# Altium PCB PCB_6位IN12-辉光管时钟_2_2024-12-10.pcbdoc (part 2 of 2)
Units mm, origin at the board's own origin, x right, y up, seen from the top; angles counter-clockwise.
Board outline 250.51 x 113.84 mm, 2 copper layers (Top Layer, Bottom Layer); 109 components, 183 nets, 545 pads, 291 vias.
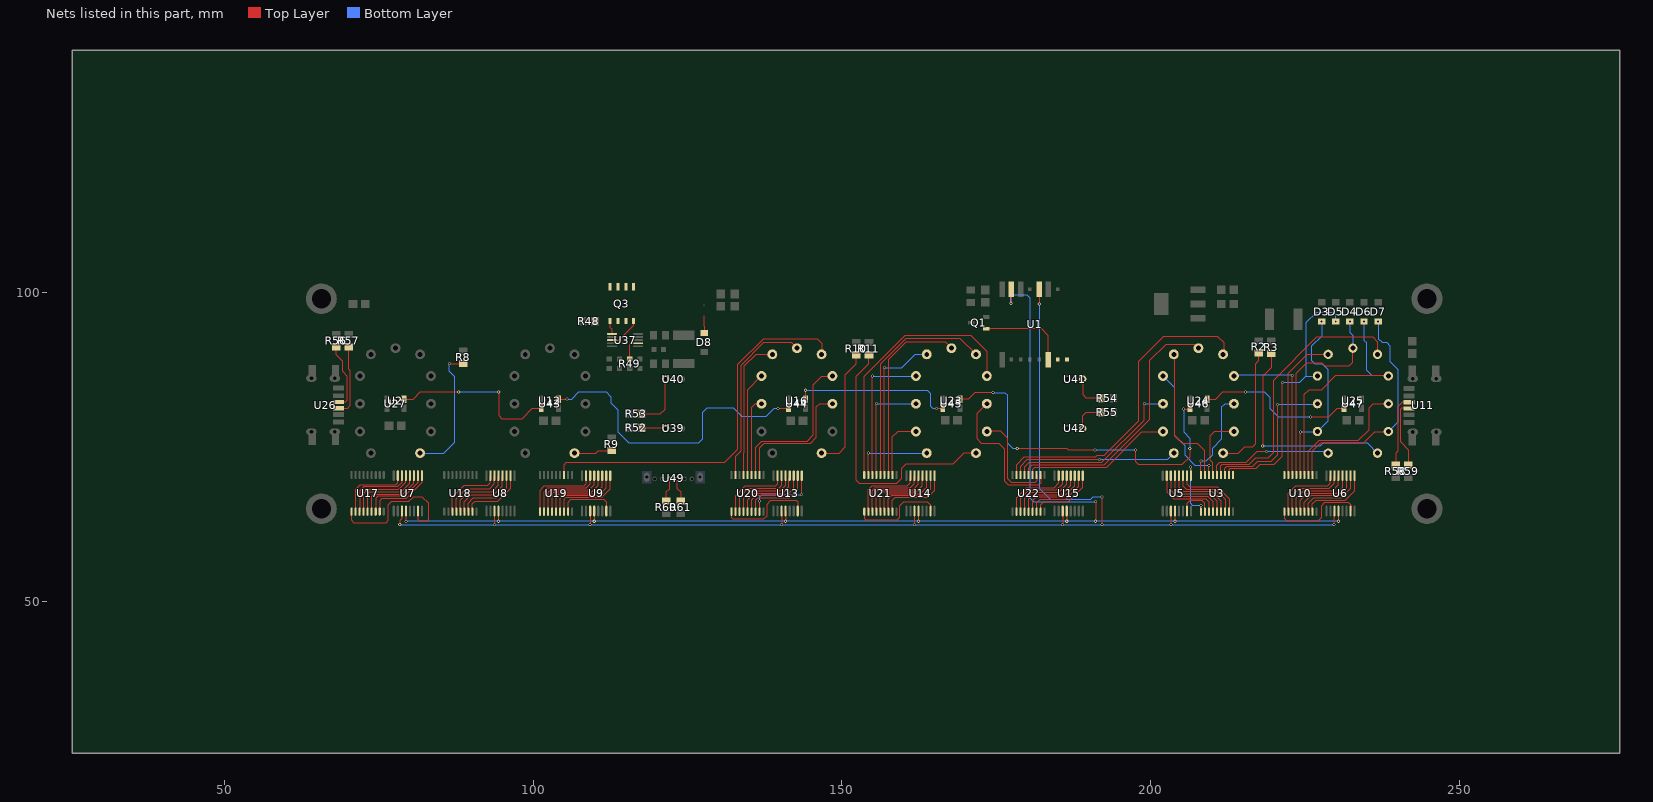
[diagram p2: the nets of this part, all layers, seen from the top]

## Via types
v1: diameter 0.5, hole 0.31, Top Layer to Bottom Layer, tented both sides, 288 vias
v2: diameter 0.62, hole 0.31, Top Layer to Bottom Layer, tented both sides, 3 vias

## Nets (pads, with @x,y where several pads share a name; then routed paths per layer and width w, separated by ;. In a path a pad name is that pad's centre, name@x,y a point inside that pad or via, vN(x,y) a via of type N, cw(c..) or ccw(c..) an arc to the next point about the centre after c; other vN are vias at no path point) (continued)
N3_3: U16.9 U20.13 | length 12.8
  Top Layer w0.15: U20.13@135.366,70.49 135.367,81.443 135.964,82.04 U16.9@136.976,82.02
N3_4: U16.8 U20.14 | length 17
  Top Layer w0.15: U20.14@134.716,70.49 134.717,84.257 U16.8@136.975,86.515
N3_5: U16.7 U20.15 | length 23
  Top Layer w0.15: U20.15@134.066,70.49 134.067,74.046 134.186,74.166 134.186,88.136 136.091,90.041 U16.7@138.728,90.021
N3_6: U16.6 U20.17 | length 29.1
  Top Layer w0.15: U20.17@132.766,70.49 132.766,73.508 133.678,74.42 133.678,88.263 137.361,91.946 141.783,91.946 U16.6@142.715,91.011
N3_7: U16.5 U19.12 | length 62
  Top Layer w0.15: U19.12@105.016,70.49 105.017,72.174 105.357,72.515 131.011,72.515 133.17,74.674 133.17,88.39 137.361,92.581 145.997,92.581 146.759,91.819 146.759,90.076 U16.5@146.704,90.021
N3_8: U16.4 U20.12 | length 26.5
  Top Layer w0.15: U20.12@136.015,70.49 136.015,74.978 136.98,75.944 144.346,75.944 145.362,76.96 145.362,85.088 146.759,86.485 148.425,86.485 U16.4@148.456,86.515
N3_9: U16.3 U20.11 | length 22
  Top Layer w0.15: U20.11@136.665,70.49 136.665,74.867 137.437,75.639 144.93,75.639 145.87,76.579 145.87,81.532 146.378,82.04 U16.3@148.456,82.02
N4_0: U22.12 U23.2 | length 16.5
  Top Layer w0.15: U23.2@173.456,77.525 173.526,77.595 175.715,77.595 176.858,76.452 176.858,69.848 177.493,69.213 181.176,69.213 181.516,69.553 U22.12@181.516,70.49
N4_1: U21.17 U23.11 | length 13
  Top Layer w0.15: U21.17@154.266,70.49 v1(154.266,74.039)
  Bottom Layer w0.15: v1@154.265,74.039 U23.11@163.728,74.019
N4_2: U21.11 U23.10 | length 10.4
  Top Layer w0.15: U21.11@158.166,70.49 158.166,76.682 159.078,77.595 161.906,77.595 U23.10@161.975,77.525
N4_3: U21.15 U23.9 | length 18
  Top Layer w0.15: U21.15@155.566,70.49 v1(155.566,82.04)
  Bottom Layer w0.15: v1(155.566,82.04) U23.9@161.975,82.02
N4_4: U21.16 U23.8 | length 23.1
  Top Layer w0.15: U21.16@154.916,70.49 v1(154.916,86.485)
  Bottom Layer w0.15: v1(154.916,86.485) 161.944,86.485 U23.8@161.975,86.516
N4_5: U21.13 U23.7 | length 25.1
  Top Layer w0.15: U21.13@156.866,70.49 v1(156.866,87.882)
  Bottom Layer w0.15: v1(156.866,87.882) 159.713,87.882 161.872,90.041 U23.7@163.728,90.021
N4_6: U21.12 U23.6 | length 30.4
  Top Layer w0.15: U21.12@157.516,70.49 157.516,89.113 160.348,91.946 166.782,91.946 U23.6@167.717,91.011
N4_7: U21.14 U23.5 | length 36.2
  Top Layer w0.15: U21.14@156.216,70.49 156.216,88.448 160.348,92.581 169.144,92.581 U23.5@171.704,90.021
N4_8: U21.18 U23.4 | length 43.6
  Top Layer w0.15: U21.18@153.616,70.49 153.617,86.485 160.221,93.089 170.889,93.089 173.429,90.549 173.429,86.543 U23.4@173.457,86.515
N4_9: U22.11 U23.3 | length 24.2
  Top Layer w0.15: U23.3@173.456,82.02 171.905,80.47 171.905,76.325 172.667,75.563 175.461,75.563 176.35,74.674 176.35,69.467 176.985,68.832 181.811,68.832 182.167,69.187 U22.11@182.166,70.49
N5_0: U3.15 U24.2 | length 10.7
  Top Layer w0.15: U3.15@210.066,70.49 210.066,72.454 209.624,72.896 209.624,76.833 210.386,77.595 213.386,77.595 U24.2@213.456,77.525
N5_1: U22.16 U24.11 | length 27.1
  Top Layer w0.15: U22.16@178.916,70.49 178.916,71.907 180.031,73.022 v1(191.717,73.023)
  Bottom Layer w0.15: v1(191.717,73.023) 202.731,73.023 U24.11@203.728,74.019
N5_2: U22.13 U24.10 | length 24.6
  Top Layer w0.15: U22.13@180.866,70.49 180.866,71.443 181.176,71.753 192.86,71.753 198.575,77.468 201.918,77.468 U24.10@201.975,77.525
N5_3: U22.15 U24.9 | length 29.5
  Top Layer w0.15: U22.15@179.566,70.49 179.566,71.795 180.285,72.514 192.099,72.514 198.957,79.372 v1(198.956,82.04)
  Bottom Layer w0.15: v1(198.956,82.04) U24.9@201.975,82.02
N5_4: U3.16 U24.8 | length 20.4
  Top Layer w0.15: U3.16@209.416,70.49 v1(209.416,72.007)
  Bottom Layer w0.15: U24.8@201.976,86.515 203.909,84.582 203.909,76.833 205.56,75.182 205.56,73.658 207.211,72.007 v1(209.416,72.007)
N5_5: U3.17 U24.7 | length 23
  Top Layer w0.15: U24.7@203.728,90.021 203.909,89.84 203.909,76.833 205.179,75.563 207.592,75.563 208.766,74.389 U3.17@208.766,70.49
N5_6: U22.14 U24.6 | length 42.8
  Top Layer w0.15: U22.14@180.216,70.49 180.217,71.557 180.793,72.133 192.48,72.133 199.846,79.499 199.846,89.024 202.513,91.691 207.036,91.691 U24.6@207.717,91.011
N5_7: U22.17 U24.5 | length 51.8
  Top Layer w0.15: U22.17@178.266,70.49 178.266,72.146 179.523,73.403 191.083,73.403 191.337,73.657 192.48,73.657 198.068,79.245 198.068,88.897 202.132,92.961 210.768,92.961 211.784,91.945 211.784,90.101 U24.5@211.704,90.021
N5_8: U10.16 U24.4 | length 25.6
  Top Layer w0.15: U10.16@222.916,70.49 v1(222.916,86.612)
  Bottom Layer w0.15: U24.4@213.456,86.516 213.551,86.612 v1(222.916,86.612)
N5_9: U3.18 U24.3 | length 15.1
  Top Layer w0.15: U3.18@208.116,70.49 v1(208.116,72.769)
  Bottom Layer w0.15: v1(208.116,72.769) 208.989,72.769 210.005,73.785 210.005,74.801 211.529,76.325 211.529,81.532 212.037,82.04 U24.3@213.456,82.02
N6_0: D7.1 U10.11 U25.2 | length 37.7
  Top Layer w0.15: U10.11@226.166,70.49 226.166,74.324 227.531,75.69 234.516,75.69 236.294,77.468 238.399,77.468 U25.2@238.456,77.525
  Bottom Layer w0.15: v1(236.802,95.349) 236.802,92.581 237.437,91.946 238.199,91.946 238.707,91.438 238.707,88.898 239.977,87.628 239.977,79.046 U25.2@238.456,77.525
N6_1: U3.14 U25.11 | length 20.6
  Top Layer w0.15: U3.14@210.716,70.49 210.717,72.082 211.149,72.514 215.464,72.514 217.242,74.292 v1(218.768,74.293)
  Bottom Layer w0.15: v1(218.768,74.293) 228.455,74.293 U25.11@228.728,74.019
N6_2: D3.1 U10.14 U25.10 | length 30.8
  Top Layer w0.15: U10.14@224.216,70.49 v1(224.216,77.468)
  Bottom Layer w0.15: v1(224.216,77.468) 226.918,77.468 U25.10@226.975,77.525 228.674,79.223 228.674,87.628 227.785,88.517 226.515,88.517 226.007,89.025 226.007,91.311 227.658,92.962 v1(227.658,95.349)
N6_3: U3.12 U25.9 | length 25.1
  Top Layer w0.15: U3.12@212.015,70.49 212.015,71.605 212.292,71.879 216.48,71.879 217.339,72.738 219.498,72.738 220.547,73.787 v1(220.546,81.913)
  Bottom Layer w0.15: v1(220.546,81.913) 226.867,81.913 U25.9@226.975,82.02
N6_4: D5.1 U3.11 U25.8 | length 43.8
  Top Layer w0.15: U3.11@212.665,70.49 212.665,71.366 212.876,71.574 217.064,71.574 217.72,72.23 220.008,72.23 221.309,73.53 v1(221.308,85.469)
  Bottom Layer w0.15: v1(221.308,85.469) 224.102,85.469 225.118,86.485 ; U25.8@226.975,86.516 226.944,86.485 225.118,86.485 ; v1(229.944,95.349) 229.944,96.391 229.563,96.772 226.769,96.772 225.118,95.121 225.118,86.485
N6_5: U10.17 U25.7 | length 24.2
  Top Layer w0.15: U10.17@222.266,70.49 222.266,86.934 225.372,90.041 U25.7@228.728,90.021
N6_6: D4.1 U10.15 U25.6 | length 33.6
  Top Layer w0.15: U10.15@223.566,70.49 223.566,86.965 225.245,88.644 227.658,88.644 228.166,88.136 232.103,88.136 232.738,88.771 U25.6@232.715,91.011
  Bottom Layer w0.15: v1(232.23,95.349) 232.23,93.597 232.738,93.089 U25.6@232.715,91.011
N6_7: U3.13 U25.5 | length 44.7
  Top Layer w0.15: U3.13@211.366,70.49 211.367,71.971 211.606,72.209 215.921,72.209 216.958,73.246 218.992,73.246 219.912,74.165 219.912,85.849 226.897,92.834 235.914,92.834 236.676,92.072 236.676,90.05 U25.5@236.704,90.021
N6_8: D6.1 U10.13 U25.4 | length 39.9
  Top Layer w0.15: U10.13@224.866,70.49 224.866,83.565 225.626,84.326 227.658,84.326 229.944,86.612 238.361,86.612 U25.4@238.456,86.516
  Bottom Layer w0.15: v1(234.516,95.349) 234.516,92.327 234.897,91.946 234.897,87.501 235.786,86.612 238.361,86.612 U25.4@238.456,86.516
N6_9: U10.12 U25.3 | length 22
  Top Layer w0.15: U10.12@225.516,70.49 225.517,74.31 227.277,76.071 233.627,76.071 235.405,77.849 235.405,81.405 236.04,82.04 U25.3@238.456,82.02
N6_DOT: U10.18
R5_2: R49.2 U37.2 | length 3.8
  Top Layer w0.15: R49.2@115.644,89.27 115.644,91.565 115.906,91.827 U37.2@116.992,91.827
R8_1: R8.1 U2.1 | length 21.7
  Top Layer w0.15: v1(86.434,88.517) R8.1@88.715,88.522
  Bottom Layer w0.15: U2.1@81.704,74.019 85.526,74.019 87.323,75.817 87.323,86.358 86.434,87.247 v1(86.434,88.517)
RST: U1.15
RX: Q1.1 U1.13 | length 14.4
  Top Layer w0.15: Q1.1@173.394,94.171 182.317,94.17 183.427,93.063 U1.13@183.426,89.167
S$10303: 
S$16964: 
S$16968: 
S$16978: 
S$17387: R52.2 U39.1 | length 3.8
  Top Layer w0.15: R52.2@117.66,78.103 121.364,78.103 U39.1@121.446,78.02
S$17391: R53.2 U40.1 | length 8.9
  Top Layer w0.15: R53.2@117.66,80.389 120.597,80.389 121.359,81.151 121.359,85.934 U40.1@121.446,86.02
S$17611: R54.2 U41.2 | length 5.8
  Top Layer w0.15: U41.2@188.986,86.02 189.05,85.956 189.05,83.437 189.558,82.929 R54.2@191.987,82.929
S$17615: R55.2 U42.2 | length 5.3
  Top Layer w0.15: U42.2@188.986,78.02 188.986,80.07 189.558,80.643 R55.2@191.987,80.643
S$18692: 
S$18696: 
S$18700: 
S$18704: 
S$19023: R56.2 U26.A5 | length 10.9
  Top Layer w0.15: R56.2@68.146,91.199 68.146,89.914 69.162,88.898 69.162,87.247 69.924,86.485 69.924,82.548 69.684,82.307 U26.A5@68.528,82.307
S$19027: R57.2 U26.B5 | length 11.6
  Top Layer w0.15: U26.B5@68.528,81.308 69.953,81.308 70.433,81.788 70.433,87.373 70.179,87.627 R57.2@70.178,91.199
S$19205: R59.2 U11.A5 | length 11
  Top Layer w0.15: R59.2@241.723,72.087 241.723,74.579 240.358,75.944 240.358,81.024 240.587,81.253 U11.A5@241.802,81.253
S$19212: R58.2 U11.B5 | length 11.7
  Top Layer w0.15: R58.2@239.691,72.087 239.691,74.006 239.977,74.293 239.977,81.532 240.698,82.253 U11.B5@241.802,82.254
S$23110: U27.3 U43.1 | length 27.4
  Top Layer w0.15: U27.3@79.116,82.77 80.561,82.771 81.735,83.945 v1(87.958,83.945) ; v1(94.435,83.945) 94.435,80.135 94.943,79.627 98.245,79.627 99.889,81.27 U43.1@101.316,81.27
  Bottom Layer w0.15: v1(87.958,83.945) v1(94.435,83.945)
S$23122: U43.3 U44.1 | length 49.8
  Top Layer w0.15: U43.3@104.116,82.771 v1(105.484,82.771) ; v1(139.647,81.278) 141.309,81.278 U44.1@141.316,81.27
  Bottom Layer w0.15: v1(105.484,82.771) 106.216,82.771 107.389,83.945 111.834,83.945 112.596,83.183 112.596,82.167 113.739,81.024 113.739,77.468 115.517,75.69 126.82,75.69 127.455,76.325 127.455,80.643 128.217,81.405 132.408,81.405 133.805,80.008 137.742,80.008 139.012,81.278 v1(139.647,81.278)
S$23134: U44.3 U45.1 | length 26
  Top Layer w0.15: U44.3@144.116,82.771 v1@144.116,84.199 ; v1(165.301,81.278) 166.31,81.278 U45.1@166.316,81.27
  Bottom Layer w0.15: v1(144.116,84.199) 163.777,84.199 164.285,83.691 164.285,81.659 164.666,81.278 v1(165.301,81.278)
S$23146: U45.3 U46.1 | length 57.9
  Top Layer w0.15: U45.3@169.116,82.77 170.477,82.771 171.524,83.818 v1(174.445,83.818) ; v1(178.382,74.801) 186.383,74.801 186.637,74.547 v1(190.955,74.547) ; v1(197.559,74.547) 197.559,72.642 198.067,72.134 205.052,72.134 206.316,73.397 v1(206.316,74.801) ; v1(205.306,81.151) 206.196,81.151 U46.1@206.316,81.27
  Bottom Layer w0.15: v1(174.445,83.818) 176.35,83.818 176.731,83.437 176.731,75.69 177.62,74.801 v1(178.382,74.801) ; v1(190.955,74.547) v1(197.559,74.547) ; v1(205.306,81.151) 205.306,77.468 206.317,76.457 v1(206.316,74.801)
S$23190: U46.3 U47.1 | length 26
  Top Layer w0.15: U46.3@209.116,82.77 210.482,82.771 211.656,83.945 v1(215.339,83.945) ; v1(225.88,79.881) 228.801,79.881 230.191,81.27 U47.1@231.316,81.27
  Bottom Layer w0.15: v1(215.339,83.945) 218.387,83.945 219.276,83.056 219.276,81.278 220.673,79.881 v1(225.88,79.881)
S$23687: 
S$52794: R60.2 U49.4 | length 3.8
  Top Layer w0.15: R60.2@121.581,66.245 121.581,67.785 122.089,68.293 U49.4@122.091,69.857
S$52798: R61.2 U49.3 | length 3.9
  Top Layer w0.15: U49.3@123.291,69.857 123.291,68.36 123.867,67.785 R61.2@123.867,66.245
SH_CP: U1.3 U5.11 U6.11 U7.11 U8.11 U9.11 U13.11 U14.11 U15.11 | length 216.6
  Top Layer w0.15: v1(78.401,62.451) 78.401,63.086 78.74,63.426 U7.11@78.741,64.656 ; v1(93.741,62.482) U8.11@93.741,64.655 ; v1(109.241,62.482) U9.11@109.241,64.655 ; v1(140.241,62.482) U13.11@140.241,64.655 ; v1(161.741,62.482) U14.11@161.741,64.655 ; U1.3@181.926,100.567 181.926,98.18 v1(181.938,98.169) ; v1(185.741,62.482) U15.11@185.741,64.655 ; v1(192.098,62.482) v1(192.098,66.927) ; v1(203.241,62.482) U5.11@203.241,64.655 ; v1(229.69,62.482) 229.741,62.532 U6.11@229.741,64.655
  Bottom Layer w0.15: v1(78.401,62.451) 229.659,62.451 v1(229.69,62.482) ; v1(181.938,98.169) 181.938,68.324 183.716,66.546 190.32,66.546 190.701,66.927 v1(192.098,66.927)
ST_CP: U1.6 U5.12 U6.12 U7.12 U8.12 U9.12 U13.12 U14.12 U15.12 | length 217.7
  Top Layer w0.15: U7.12@79.391,64.656 79.391,62.985 v1(79.417,62.959) ; v1(94.391,62.99) U8.12@94.391,64.655 ; v1(109.891,62.99) U9.12@109.891,64.655 ; v1(140.891,62.99) U13.12@140.891,64.655 ; v1(162.391,62.99) U14.12@162.391,64.655 ; v1(177.366,98.296) 177.426,98.355 U1.6@177.426,100.567 ; v1(186.391,62.99) U15.12@186.391,64.655 ; v1(191.082,62.99) v1(191.082,66.165) ; v1(203.891,62.99) U5.12@203.891,64.655 ; v1(230.391,62.99) U6.12@230.391,64.655
  Bottom Layer w0.15: v1(79.417,62.959) 79.417,62.99 v1(230.391,62.99) ; v1(177.366,98.296) 177.366,99.439 177.62,99.693 179.906,99.693 180.414,99.185 180.414,66.8 181.049,66.165 v1(191.082,66.165)
T1_2: Q3.5 Q3.6 Q3.7 Q3.8
T1_3: D8.2 | length 2.8
  Top Layer w0.15: 127.644,96.228 127.644,94.613 127.709,94.548 D8.2@127.709,93.496
TX: U1.14
U1_1: U7.1 U17.8 | length 11
  Top Layer w0.15: U17.8@75.165,64.551 75.165,66.327 75.48,66.642 79.417,66.642 81.99,69.215 U7.1@81.99,70.388
U1_2: U7.7 U17.2 | length 12
  Top Layer w0.15: U17.2@71.266,64.553 71.266,68.143 72.051,68.928 77.766,68.928 78.091,69.253 U7.7@78.091,70.387
U1_3: U7.2 U17.7 | length 11.2
  Top Layer w0.15: U17.7@74.514,64.551 74.514,66.693 74.845,67.023 79.163,67.023 81.342,69.202 U7.2@81.341,70.387
U1_4: U7.4 U17.5 | length 11.6
  Top Layer w0.15: U17.5@73.216,64.553 73.216,67.426 73.575,67.785 78.655,67.785 80.041,69.171 U7.4@80.041,70.387
U1_5: U7.6 U17.3 | length 11.9
  Top Layer w0.15: U17.3@71.916,64.553 71.916,67.904 72.559,68.547 78.02,68.547 78.74,69.268 U7.6@78.741,70.387
U1_6: U7.5 U17.4 | length 11.6
  Top Layer w0.15: U17.4@72.566,64.553 72.566,67.538 73.194,68.166 78.274,68.166 79.391,69.283 U7.5@79.391,70.387
U1_7: U7.3 U17.6 | length 11.4
  Top Layer w0.15: U17.6@73.866,64.553 73.867,67.061 74.21,67.404 78.909,67.404 80.692,69.187 U7.3@80.691,70.387
U1_8: Q3.4 U37.8 | length 5.2
  Top Layer w0.15: U37.8@112.772,92.327 113.869,92.327 116.279,94.741 Q3.4@116.278,95.399
U1_61: Q3.1 Q3.2 Q3.3 R48.2 U37.6 | length 2.2
  Top Layer w0.15: Q3.1@112.468,95.399 112.469,94.359 112.772,94.055 U37.6@112.772,93.327
U2_1: U7.15 U17.1 | length 23.6
  Top Layer w0.15: U17.1@70.616,64.553 70.616,63.124 71.035,62.705 76.115,62.705 76.496,63.086 76.496,65.626 77.004,66.134 79.798,66.134 80.56,66.896 82.084,66.896 83.1,65.88 83.1,63.34 82.846,63.086 81.576,63.086 81.342,63.319 U7.15@81.341,64.656
U2_2: U8.7 U18.3 | length 10.6
  Top Layer w0.15: U18.3@86.916,64.552 86.917,66.903 88.815,68.801 92.625,68.801 93.092,69.268 U8.7@93.091,70.386
U2_3: U8.6 U18.4 | length 10.6
  Top Layer w0.15: U18.4@87.565,64.551 87.565,66.662 89.196,68.293 93.008,68.293 93.742,69.027 U8.6@93.741,70.386
U2_4: U8.5 U18.5 | length 10.6
  Top Layer w0.15: U18.5@88.215,64.551 88.215,66.423 89.577,67.785 93.389,67.785 94.39,68.788 U8.5@94.39,70.386
U2_5: U8.4 U18.6 | length 10.6
  Top Layer w0.15: U18.6@88.865,64.551 88.865,66.185 89.958,67.277 93.643,67.277 95.04,68.676 U8.4@95.04,70.386
U2_6: U8.3 U18.7 | length 10.6
  Top Layer w0.15: U18.7@89.516,64.551 89.516,65.946 90.339,66.769 94.024,66.769 95.69,68.438 U8.3@95.69,70.386
U2_7: U8.2 U18.8 | length 10.6
  Top Layer w0.15: U18.8@90.166,64.552 90.166,65.834 90.593,66.261 94.278,66.261 96.341,68.323 U8.2@96.341,70.386
U3_1: U9.7 U19.1 | length 12.7
  Top Layer w0.15: U19.1@101.116,64.552 101.115,68.019 101.801,68.705 108.268,68.705 108.591,69.027 U9.7@108.591,70.386
U3_2: U9.6 U19.2 | length 12.6
  Top Layer w0.15: U19.2@101.766,64.552 101.766,67.781 102.386,68.4 108.609,68.4 109.241,69.032 U9.6@109.241,70.386
U3_3: U9.4 U19.4 | length 12.5
  Top Layer w0.15: U19.4@103.066,64.552 103.066,67.429 103.428,67.792 109.524,67.792 110.541,68.808 U9.4@110.541,70.386
U3_4: U9.3 U19.5 | length 12.4
  Top Layer w0.15: U19.5@103.716,64.552 103.716,67.063 104.14,67.487 110.109,67.487 111.191,68.57 U9.3@111.191,70.386
U3_5: U9.2 U19.6 | length 12.3
  Top Layer w0.15: U19.6@104.366,64.552 104.366,66.697 104.852,67.183 110.567,67.183 111.841,68.458 U9.2@111.841,70.386
U3_6: U9.5 U19.3 | length 12.6
  Top Layer w0.15: U19.3@102.416,64.552 102.416,67.668 102.844,68.096 109.067,68.096 109.891,68.92 U9.5@109.891,70.386
U3_10: U3.10
U4_1: U9.15 U19.8 | length 9.6
  Top Layer w0.15: U19.8@105.666,64.552 105.666,66.092 106.119,66.546 111.453,66.546 111.841,66.158 U9.15@111.841,64.655
U4_2: U9.1 U19.7 | length 12.4
  Top Layer w0.15: U19.7@105.016,64.552 105.016,66.585 105.309,66.879 111.151,66.879 112.491,68.218 U9.1@112.491,70.386
U4_3: U13.3 U20.6 | length 11.6
  Top Layer w0.15: U20.6@135.366,64.552 135.367,66.457 136.091,67.181 141.044,67.181 142.192,68.329 U13.3@142.191,70.386
U4_4: U13.4 U20.5 | length 10.9
  Top Layer w0.15: U20.5@134.716,64.552 134.717,66.441 135.837,67.562 140.409,67.562 141.425,68.578 U13.4@141.425,69.975
U4_5: U13.5 U20.4 | length 11.4
  Top Layer w0.15: U20.4@134.066,64.552 134.067,66.68 135.329,67.943 140.028,67.943 140.892,68.806 U13.5@140.891,70.386
U4_6: U13.7 U20.2 | length 11.6
  Top Layer w0.15: U20.2@132.766,64.552 132.766,67.158 134.313,68.705 139.266,68.705 139.591,69.03 U13.7@139.591,70.386
U4_7: U13.6 U20.3 | length 11.6
  Top Layer w0.15: U20.3@133.416,64.552 133.417,66.919 134.821,68.324 139.774,68.324 140.241,68.791 U13.6@140.241,70.386
U5_1: U13.2 U20.7 | length 11.7
  Top Layer w0.15: U20.7@136.015,64.552 136.015,66.469 136.345,66.8 141.552,66.8 142.84,68.087 U13.2@142.84,70.386
U5_2: U13.1 U20.8 | length 12.5
  Top Layer w0.15: U20.8@136.666,64.552 v1@136.666,66.292 ; v1(143.457,67.308) 143.491,67.341 U13.1@143.491,70.386
  Bottom Layer w0.15: v1(136.666,66.292) 136.665,66.993 136.98,67.308 v1(143.457,67.308)
U5_3: U13.15 U20.1 | length 15.8
  Top Layer w0.15: U20.1@132.116,64.552 132.116,63.536 132.281,63.371 137.361,63.371 137.869,63.879 137.869,65.784 138.504,66.419 142.568,66.419 142.84,66.147 U13.15@142.84,64.656
U5_4: U14.7 U21.2 | length 12
  Top Layer w0.15: U21.2@154.266,64.552 154.266,68.083 154.887,68.705 160.602,68.705 161.091,69.193 U14.7@161.091,70.386
U5_5: U14.4 U21.5 | length 11.9
  Top Layer w0.15: U21.5@156.216,64.552 156.216,67.366 156.641,67.792 162.102,67.792 163.041,68.73 U14.4@163.041,70.386
U5_6: U14.5 U21.4 | length 11.9
  Top Layer w0.15: U21.4@155.566,64.552 155.566,67.732 155.93,68.096 161.518,68.096 162.391,68.969 U14.5@162.391,70.386
U5_7: U14.6 U21.3 | length 12
  Top Layer w0.15: U21.3@154.916,64.552 154.916,67.971 155.345,68.4 161.06,68.4 161.741,69.081 U14.6@161.741,70.386
U6_1: U14.3 U21.6 | length 11.8
  Top Layer w0.15: U21.6@156.866,64.552 156.866,67 157.353,67.487 162.687,67.487 163.691,68.491 U14.3@163.691,70.386
U6_2: U14.2 U21.7 | length 11.7
  Top Layer w0.15: U21.7@157.516,64.552 157.516,66.634 158.062,67.181 163.269,67.181 164.341,68.252 U14.2@164.341,70.386
U6_3: U14.1 U21.8 | length 11.7
  Top Layer w0.15: U21.8@158.166,64.552 158.166,66.395 158.647,66.876 163.854,66.876 164.991,68.013 U14.1@164.991,70.386
U6_4: U14.15 U21.1 | length 15.4
  Top Layer w0.15: U21.1@153.616,64.552 153.617,63.498 153.871,63.244 158.951,63.244 159.332,63.625 159.332,65.53 159.967,66.165 163.777,66.165 164.341,65.601 U14.15@164.341,64.655
U6_5: U15.1 U22.8 | length 11
  Top Layer w0.15: U22.8@182.166,64.552 182.167,65.631 182.701,66.164 186.635,66.164 188.992,68.521 U15.1@188.991,70.386
U6_6: U15.2 U22.7 | length 11.1
  Top Layer w0.15: U22.7@181.516,64.552 181.517,65.997 182.066,66.545 186.254,66.545 188.342,68.633 U15.2@188.341,70.386
U7_1: U15.6 U22.3 | length 11.3
  Top Layer w0.15: U22.3@178.916,64.552 178.916,66.698 180.288,68.069 184.73,68.069 185.741,69.08 U15.6@185.741,70.386
U7_2: U15.7 U22.2 | length 11.3
  Top Layer w0.15: U22.2@178.266,64.552 178.265,66.81 179.906,68.451 184.351,68.451 185.09,69.19 U15.7@185.091,70.386
U7_3: U15.5 U22.4 | length 11.3
  Top Layer w0.15: U22.4@179.566,64.552 179.566,66.713 180.542,67.688 185.111,67.688 186.391,68.968 U15.5@186.391,70.386
U7_4: U3.3 U5.7 | length 11.7
  Top Layer w0.15: U5.7@202.591,70.386 202.591,67.8 203.719,66.672 208.863,66.672 209.416,66.119 U3.3@209.416,64.552
U7_5: U3.2 U5.15 | length 5.8
  Top Layer w0.15: U5.15@205.841,64.655 205.842,65.812 206.322,66.292 208.354,66.292 208.766,65.88 U3.2@208.766,64.552
U7_6: U15.4 U22.5 | length 11.3
  Top Layer w0.15: U22.5@180.216,64.552 180.217,66.601 180.923,67.307 185.492,67.307 187.041,68.857 U15.4@187.041,70.386
U7_7: U15.3 U22.6 | length 11.3
  Top Layer w0.15: U22.6@180.866,64.552 180.867,66.362 181.431,66.926 185.873,66.926 187.692,68.745 U15.3@187.691,70.386
U8_1: U6.6 U10.3 | length 11.5
  Top Layer w0.15: U10.3@222.916,64.552 222.916,67.14 224.1,68.323 228.929,68.323 229.741,69.136 U6.6@229.741,70.386
U8_2: U3.1 U5.1 | length 10
  Top Layer w0.15: v1(206.449,71.753) 206.491,71.711 U5.1@206.491,70.386 ; U3.1@208.116,64.552 v1(208.116,65.53)
  Bottom Layer w0.15: v1(206.449,71.753) 206.449,65.911 206.83,65.53 v1(208.116,65.53)
U8_3: U3.4 U5.6 | length 11.6
  Top Layer w0.15: U5.6@203.241,70.386 203.242,68.039 204.227,67.053 209.244,67.053 210.067,66.23 U3.4@210.066,64.552
U8_4: U3.5 U5.5 | length 11.5
  Top Layer w0.15: U5.5@203.891,70.386 203.892,68.278 204.735,67.434 209.625,67.434 210.717,66.342 U3.5@210.716,64.552
U8_5: U3.6 U5.4 | length 11.4
  Top Layer w0.15: U5.4@204.541,70.386 204.542,68.516 205.243,67.815 209.879,67.815 211.367,66.327 U3.6@211.366,64.552
U8_6: U3.7 U5.3 | length 11.4
  Top Layer w0.15: U5.3@205.191,70.386 205.192,68.755 205.751,68.196 210.343,68.196 212.017,66.525 U3.7@212.016,64.552
U8_7: U3.8 U5.2 | length 11.3
  Top Layer w0.15: U5.2@205.841,70.386 205.842,69.058 206.322,68.578 210.767,68.578 212.667,66.678 U3.8@212.666,64.552
U9_1: U6.7 U10.2 | length 11.7
  Top Layer w0.15: U10.2@222.266,64.552 222.266,67.505 223.465,68.704 228.675,68.704 229.091,69.121 U6.7@229.091,70.386
U9_2: U6.5 U10.4 | length 11.4
  Top Layer w0.15: U10.4@223.566,64.552 223.567,66.774 224.735,67.942 229.437,67.942 230.392,68.897 U6.5@230.391,70.386
U9_3: U6.4 U10.5 | length 11.4
  Top Layer w0.15: U10.5@224.216,64.552 224.217,66.408 225.37,67.561 230.072,67.561 231.042,68.532 U6.4@231.041,70.386
U9_4: U6.3 U10.6 | length 11.3
  Top Layer w0.15: U10.6@224.866,64.552 224.867,66.042 226.005,67.18 230.453,67.18 231.692,68.42 U6.3@231.691,70.386
U9_5: U6.2 U10.7 | length 11.3
  Top Layer w0.15: U10.7@225.516,64.552 225.517,65.926 226.388,66.8 230.833,66.8 232.342,68.308 U6.2@232.341,70.386
U9_6: U6.1 U10.8 | length 11.4
  Top Layer w0.15: U10.8@226.166,64.552 226.167,65.814 226.769,66.419 231.468,66.419 232.992,67.943 U6.1@232.991,70.386
U9_DOT: U6.15 U10.1 | length 15.5
  Top Layer w0.15: U10.1@221.616,64.552 221.616,63.444 221.943,63.117 227.15,63.117 227.658,63.625 227.658,65.53 228.166,66.038 231.976,66.038 232.341,65.673 U6.15@232.341,64.655
U12_1: R9.2 U12.1 | length 6.2
  Top Layer w0.15: U12.1@106.704,74.019 110.164,74.019 110.58,74.436 R9.2@112.723,74.435
U16_1: R10.2 U16.1 | length 19.9
  Top Layer w0.15: U16.1@146.704,74.019 149.534,74.019 150.569,75.055 150.569,86.739 152.347,88.517 R10.2@152.347,89.929
U23_1: R11.2 U23.1 | length 43.8
  Top Layer w0.15: R11.2@154.379,89.929 154.379,88.517 152.347,86.485 152.347,69.594 152.855,69.086 158.824,69.086 159.586,69.848 159.586,71.499 160.348,72.261 167.968,72.261 169.727,74.019 U23.1@171.704,74.019
U24_1: R2.2 U24.1 | length 20.8
  Top Layer w0.15: U24.1@211.704,74.019 214.177,74.019 215.212,75.055 216.482,75.055 216.99,75.563 216.99,88.517 217.498,89.025 R2.2@217.498,90.218
U25_1: R3.2 U25.1 | length 35.1
  Top Layer w0.15: v1(218.133,75.182) 218.133,86.485 219.53,87.882 R3.2@219.53,90.183
  Bottom Layer w0.15: v1(218.133,75.182) 227.404,75.182 227.912,75.69 235.034,75.69 U25.1@236.704,74.019
pads on no net: T3.NC U1.1 U1.4 U1.9 U1.11 U1.12 U6.9 U8.1 U8.15 U10.10 U15.15 U17.10 U18.1 U18.2 U18.10 U18.17 U18.18 U19.10 U20.10 U21.10 U22.1 U22.10 U22.18 U47.3

## Polygon pours and split planes (outlines as drawn)
GND on Bottom Layer (solid): 61.716,61.021 248.216,61.021 248.716,61.521 248.716,103.52 62.216,103.52 61.716,103.02
GND on Top Layer (solid): 248.716,61.021 248.716,102.003 247.343,103.376 62.716,103.52 61.716,102.52 61.716,62.021 62.716,61.021

## Keep-outs
Keep-Out Layer:
  lines w0.254: 62.716,65.021 ccw(c65.716,65.021) 65.716,62.021 ; 62.716,99.02 cw(c65.716,99.02) 65.716,102.02 ; 244.716,62.021 ccw(c244.716,65.021) 247.716,65.021 ; 244.716,102.02 cw(c244.716,99.02) 247.716,99.02

## Other copper
Top Layer:
  pour cut-out net 2333: 184.605,87.628 195.019,87.628 195.019,101.852 184.986,101.852 184.605,101.471
  region net T1_2: 112.088,96.645 116.152,96.645 117.295,95.502 119.454,95.502 119.454,100.455 117.803,100.455 116.66,101.598 112.088,101.598
  region net U1_61: 109.294,94.232 111.199,94.232 111.707,94.74 115.39,94.74 115.39,96.01 111.707,96.01 111.199,96.518 109.294,96.518
  pour cut-out net T1_2: 119.454,101.598 119.454,94.232 126.693,94.232 126.693,101.598
Bottom Layer:
  pour cut-out net 233: 184.605,87.628 195.019,87.628 195.019,101.852 184.986,101.852 184.605,101.471
  pour cut-out net 233: 119.454,101.598 126.693,101.598 126.693,94.232 119.454,94.232 119.454,101.598

## Silkscreen, mask and mechanical layers (free items; w line width, h text height)
Top Overlay:
  lines w0.254 net S$10303: 62.716,62.022 247.717,62.022 247.717,102.022 62.716,102.022 62.716,62.022
  lines w0.254 net S$23687: 117.215,68.522 128.215,68.522 128.215,71.522 117.215,71.522 117.215,68.522
Document:
  lines w0.15 net S$16964: 122.716,59.521 122.716,104.52
  lines w0.15 net S$16968: 60.216,82.02 250.216,82.02
  lines w0.15 net S$16978: 187.716,58.021 187.716,104.52

## Text inside footprints (layer, text, board x,y; h text height)
U11: Top Overlay "TYPEC-6P" at 244.683,85.078 h0.9 r270
U26: Top Overlay "TYPEC-6P" at 65.647,78.482 h0.9 r90